# Altium PCB CE_BJTInfineonSOT343_Simple_v1.PcbDoc
Units mm, origin at the board's own origin, x right, y up, seen from the top; angles counter-clockwise.
Board outline 40 x 8 mm, 2 copper layers (Top Layer, Bottom Layer); 17 components, 8 nets, 41 pads, 4 vias.
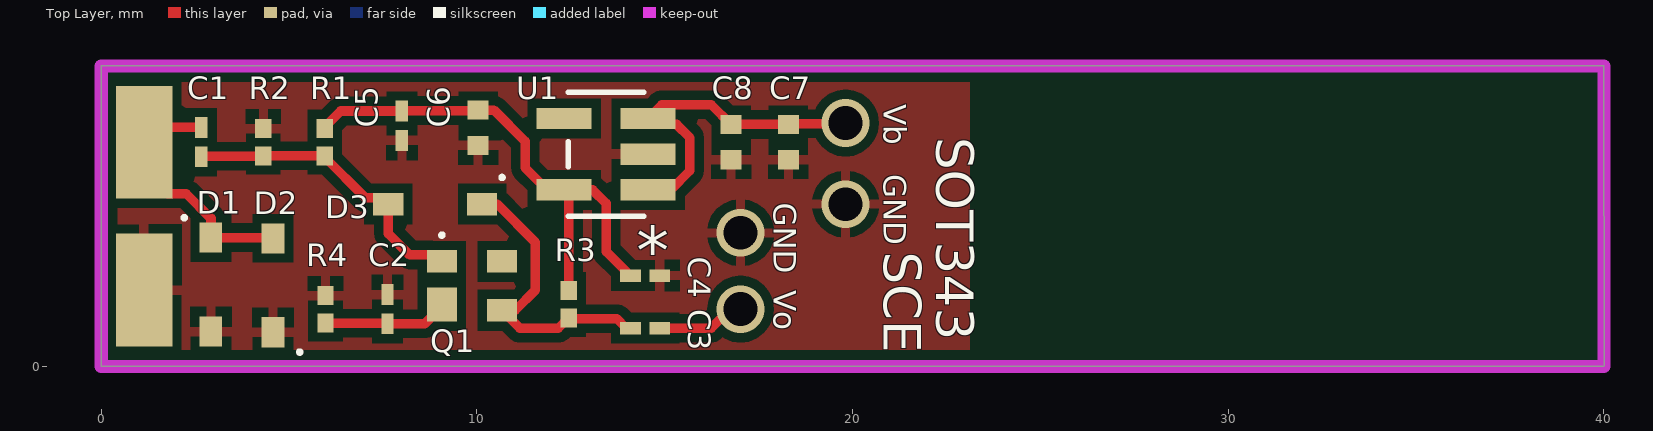
[diagram p0: Top Layer view]
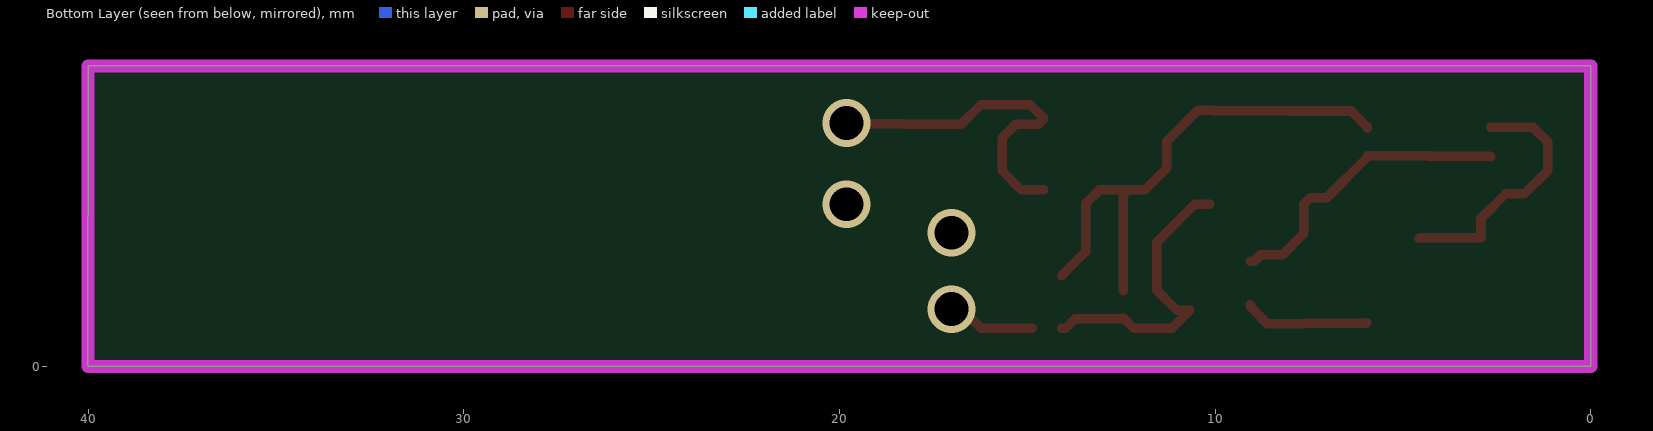
[diagram p1: Bottom Layer view, seen from below]

## Layer stack, top to bottom
Top Solder: solder mask 0.0102, Solder Resist, Dk 3.5
Top Layer: signal copper 0.0356
Dielectric 1: dielectric 0.32, FR-4, Dk 4.8
Bottom Layer: signal copper 0.0356
Bottom Solder: solder mask 0.0102, Solder Resist, Dk 3.5

## Board outline
0,0 0,8 40,8 40.005,0

## Design rules (kind name [scope] priority, off if disabled: settings)
Clearance [All] p1: gap=0.254 ignorepadtopadclearanceinfootprint=FALSE except(0: Arc-Hole Track-Hole SMDPad-Hole THPad-Hole Via-Hole Fill-Hole Poly-Hole Region-Hole Text-Hole)
PolygonConnect [All] p1: connectstyle=Relief reliefconductorwidth=0.254 reliefentries=4 polygonreliefangle="90 Angle" airgapwidth=0.254
RoomDefinition CE_BJTInfineonSOT343_Simple_v1 [InComponentClass('CE_BJTInfineonSOT343_Simple_v1')] p1: confinementstyle=ConfineIn formatcopy=TRUE lockcomponents=FALSE outline 0,8.001 40.005,8.001 40.005,0 0,0
RoutingVias [All] p1: holewidth=0.711 width=1.27 viastyle="Through Hole" minholewidth=0.711 minwidth=1.27 maxholewidth=0.711 maxwidth=1.27
SolderMaskExpansion [All] p1: expansion=0.102
Width [All] p1: maxlimit=0.254 minlimit=0.254 preferedwidth=0.254
30 further rules are at their usual default settings.

## Components (designator, comment, footprint, x,y, rotation, side; value= is the part's Value field where it differs from the comment)
C1 "Cin" C0201 2.667,5.969 r270 top value=Value
C2 "" C0201 7.62,1.524 r270 top value=Value
C3 "" C0201 14.478,1.016 r0 top value=Value
C4 "" CAP_CBR_0201 14.478,2.413 r180 top value=Value
C5 "" CAP_CBR_0201 8.001,6.406 r90 top value=Value
C6 "" YAG_CC0402 10.033,6.35 r90 top value=Value
C7 "" YAG_CC0402 18.288,5.969 r90 top value=Value
C8 "" YAG_CC0402 16.764,5.969 r90 top value=Value
D1 "" INF-SOD323_V 2.921,2.179 r0 top
D2 "" INF-SOD323_V 4.572,2.159 r180 top
D3 "" INF-SOD323_V 8.89,4.318 r270 top
Q1 "SOT343" INF-SOT343_V 9.868,2.144 r0 top
R1 "" RES_RC0201_P6XP3 5.95,5.969 r90 top value=Value
R2 "" RES_RC0201_P6XP3 4.314,5.969 r270 top value=Value
R3 "" RES_RC0201_P6XP3 12.446,1.651 r90 top value=Value
R4 "" RES_RC0201_P6XP3 5.969,1.524 r270 top value=Value
U1 "" DBV5 13.437,5.649 r180 top value=Value

## Footprints (in the part's own frame and the unit in brackets; to place one, negate y for a bottom-side part, rotate by r counter-clockwise, add the part's x,y. Pads: shape width x height; smd on the part's side, far side on the other; paste and mask are expansions set on the pad)
C0201 [mil]
  rect 21.78x13 smd paste+0 mask+0: 1(-15.39,0) 2(15.39,0)
  body extent 0,0 10,10, height 10
CAP_CBR_0201 [mil]
  rect 21.78x13 smd paste+0 mask+0: 1(-15.39,0) 2(15.39,0)
  body extent 0,0 10,10, height 10
DBV5 [mil]
  rect 57.56x22.36 smd paste+0 mask+0: 1(-44,37.4) 2(-44,0) 3(-44,-37.4) 4(44,-37.4) 5(44,37.4)
  silkscreen extent -40,-65 40,65, body extent 0,0 10,10, height 10
INF-SOD323_V [mm] "SOD, 2-Leads, Body 1.7x1.25 mm"
  rect 0.6x0.8 smd: 1(0,1.25) 2(0,-1.25)
  silkscreen extent -0.76,1.73 -0.66,1.83, body extent -0.63,-0.85 0.63,0.85, height 1.1
INF-SOT343_V [mm] "SOT343, 4-Leads, Body 2x1.25 mm"
  rect 0.8x0.6 smd: 1(-0.8,0.65) 3(0.8,-0.65) 4(0.8,0.65)
  rect 0.8x0.9 smd: 2(-0.8,-0.5)
  silkscreen extent -0.85,1.3 -0.75,1.4, body extent -0.63,-1 0.63,1, height 1
RES_RC0201_P6XP3 [mm]
  rect 0.503x0.43 smd paste+0 mask+0: 1(-0.366,0) 2(0.366,0)
  body extent 0,0 0.25,0.25, height 0.25
YAG_CC0402 [mil]
  rect 20x22 smd paste+0 mask+0: 1(-18.5,0) 2(18.5,0)
  body extent 0,0 10,10, height 10

## Part data
C1 C2 C3: library part C0201C270J3GACTU, "No Description Available", Built_By=EMA_UL_Team, Copyright="Copyright (C) 2018 Accelerated Designs. All rights reserved", Manufacturer_Part_Number=C0201C270J3GACTU, RefDes=RefDes, Type=DEV, Vendor=Kemet
C4 C5: library part CBR02C399C3GAC, "No Description Available", Built_By=EMA_UL_Team, Copyright="Copyright (C) 2018 Accelerated Designs. All rights reserved", Manufacturer_Part_Number=CBR02C399C3GAC, RefDes=RefDes, Type=DEV, Vendor=KEMET
C6 C7 C8: library part CC0402KRX7R9BB10, "No Description Available", Manufacturer_Part_Number=CC0402KRX7R9BB103, Built_By=EMA_UL_Team, Copyright="Copyright (C) 2018 Accelerated Designs. All rights reserved", RefDes=RefDes, Type=DEV, Vendor=Yageo
D1 D2 D3: library part BAT15-03W, "Single Silicon Schottky Diode, 110 mA IF Max, SOD32, Green", Manufacturer=Infineon, Supplier Part Number 1=N/A, ComponentLink1Description="Manufacturer URL", ComponentLink1URL=http://www.infineon.com/, ComponentLink2Description=Datasheet, ComponentLink2URL=http://www.infineon.com/dgdl/bat15series.pdf?folderId=db3a304314dca3890114ff6812070b44&fileId=db3a304314dca3890114ff6b74ca0b48&location=en.Products.RF.RF_Mixer___Detector_Schottky_Diodes.DATASHEET.bat15series.pdf, ComponentLink3Description="Package Specification", ComponentLink3URL=http://www.infineon.com/dgdl/SOD323-Package_Overview.pdf?folderId=db3a30431936bc4b011952aab84f3bbe&fileId=db3a30431936bc4b011952beed653be3, Configuration=Single, CT (typ)="0.26 pF", DatasheetVersion=Jun-2011, Green=yes, Group="RF Mixer", IF (max)="110 mA", Mounting Technology="Surface Mount", PackageDescription="2-Pin Small Outline Diode Package, 1.25 x 1.7 mm Body", PackageReference=SOD323, PartNumber=BAT15-03W, Supplier 1=Mouser, VF (typ)="0.23 V", VR (max)="4 V"
Q1: library part BFP840ESD, "Robust Low Noise Silicon Germanium Bipolar RF Transistor, 2.25 V VCEO, 35 mA IC, 33.5 dB Gmax, SOT343, Green", Manufacturer=Infineon, ComponentLink1Description="Manufacturer URL", ComponentLink1URL=http://www.infineon.com/, ComponentLink2Description=Datasheet, ComponentLink2URL=http://www.infineon.com/dgdl/Infineon_Robust_WiFi_SiGe_LNA_BFP840ESD_Rev1_1.pdf?folderId=db3a30431f848401011fcbf2ab4c04c4&fileId=db3a304336ca04c90136e88a4d5f35b7&location=en.Products.RF.RF_Transistors_.Ultra_Low_Noise_SiGe_C_Transistors_for_use_up_to_12_GHz.DATASHEET.Infineon_Robust_WiFi_SiGe_LNA_BFP840ESD_Rev1_1.pdf, ComponentLink3Description="Package Specification", ComponentLink3URL=http://www.infineon.com/dgdl/SOT343-Package_Overview.pdf?folderId=db3a30431936bc4b0119535155343cba&fileId=db3a30431936bc4b0119535a9f393cd3, DatasheetVersion="Rev. 1.1", Gmax (typ)="33.5 dB", Green=yes, Group="Robust ultra low noise SiGe", Halogen-free=yes, IC (max)="35 mA", Mounting Technology="Surface Mount", NFmin (typ)="0.6 dB", PackageDescription="4-Pin Small Outline Transistor Package, 1.25 x 2 mm Body", PackageReference=SOT343, PartNumber=BFP840ESD, Ptot (max)="75.0 mW", VCEO (max)="2.25 V"
R1 R2 R3 R4: library part RC0201FR-0718KL, "No Description Available", Built_By=EMA_Anthony, Copyright="Copyright (C) 2018 Accelerated Designs. All rights reserved", Manufacturer_Part_Number=RC0201FR-0718KL, RefDes=RefDes, Type=DEV, Vendor=Yageo
U1: library part LP5907MFX-3.3/NO, "No Description Available", Manufacturer_Part_Number=LP5907MFX-3.3/NOPB, Built_By=EMA_UL_Team, Copyright="Copyright (C) 2018 Accelerated Designs. All rights reserved", RefDes=RefDes, Type=DEV, Vendor="Texas Instruments"

## Free pads (board coordinates)
  rect 1.5x3 smd: ""(1.143,2.032) ""(1.143,5.969)

## Via types
v1: diameter 1.27, hole 0.9, Top Layer to Bottom Layer, 4 vias

## Nets (pads, with @x,y where several pads share a name; then routed paths per layer and width w, separated by ;. In a path a pad name is that pad's centre, name@x,y a point inside that pad or via, vN(x,y) a via of type N, cw(c..) or ccw(c..) an arc to the next point about the centre after c; other vN are vias at no path point)
B: C1.2 D3.2 Q1.1 R1.1 R2.2 | length 8.1
  Top Layer w0.254: C1.2 2.679,5.591 4.302,5.591 R2.2 R1.1 5.95,5.567 7.026,4.491 7.467,4.491 D3.2 7.64,3.536 8.209,2.967 8.795,2.967 8.968,2.794 Q1.1
C: C3.1 D3.1 Q1.3 R3.1 | length 8.1
  Top Layer w0.254: D3.1 10.541,4.318 11.557,3.302 11.557,2.032 11.019,1.494 Q1.3 11.146,1.016 12.166,1.016 12.446,1.296 R3.1 12.461,1.27 13.722,1.27 13.976,1.016 C3.1
E: C2.2 Q1.2 R4.2 | length 3.4
  Top Layer w0.254: R4.2 5.981,1.146 7.607,1.146 C2.2 8.607,1.133 9.05,1.576 9.05,1.626 Q1.2
GND: C2.1 C4.1 C5.1 C6.1 C7.1 C8.1 D1.2 D2.1 pad.@1.143,2.032 R2.1 R4.1 U1.2
  other v1: 17.018,3.556 19.812,4.318
Vbatt: C7.2 C8.2 U1.1 U1.3 | length 9.2
  Top Layer w0.254: U1.1 15.158,4.699 15.666,5.207 15.666,6.091 15.315,6.442 14.711,6.442 U1.3 14.92,6.965 16.238,6.965 C8.2 C7.2 18.307,6.458 19.793,6.458 v1(19.812,6.477)
Vcc: C4.2 C5.2 C6.2 R1.2 R3.2 U1.5 | length 14.1
  Top Layer w0.254: R1.2 5.95,6.371 6.376,6.797 C5.2 8.012,6.809 10.022,6.809 C6.2 10.452,6.82 11.287,5.985 11.287,5.284 11.872,4.699 U1.5 ; R3.2 12.446,4.572 U1.5 ; C4.2 13.442,3.058 13.442,4.338 13.081,4.699 U1.5
Vin: C1.1 D1.1 D2.2 pad.@1.143,5.969 | length 6.9
  Top Layer w0.254: C1.1 1.534,6.36 1.143,5.969 1.143,5.219 1.766,4.596 2.262,4.596 2.921,3.937 D1.1 4.552,3.429 D2.2
Vout: C3.2 | length 2.4
  Top Layer w0.254: C3.2 16.235,1.016 16.743,1.524 v1(17.018,1.524)
pads on no net: Q1.4 U1.4

## Polygon pours and split planes (outlines as drawn)
GND on Top Layer "Top Layer-No Net 3" (solid, remove dead copper, pour order 8): 0,7.874 0.127,8.001 22.987,8.001 23.114,7.874 23.114,0.127 22.987,0 0.127,0 0,0.127

## Keep-outs
Keep-Out Layer:
  the board outline again, w0.35

## Silkscreen, mask and mechanical layers (free items; w line width, h text height)
Top Overlay:
  text "Vb" at 20.828,6.977 h0.6 r270
  text "SOT343" at 22.225,6.096 h1 r270
  text "GND" at 20.828,5.118 h0.6 r270
  text "GND" at 17.907,4.356 h0.6 r270
  text "SCE" at 20.828,3.048 h1 r270
  text "Vo" at 17.907,2.024 h0.6 r270

## Text inside footprints (layer, text, board x,y; h text height)
U1: Top Overlay "*" at 15.126,4.258 h1.27 r180; Mechanical 13 "*" at 14.376,5.223 h1.27 r180